# EAGLE board PCB v153 (EAGLE 9.7.0)
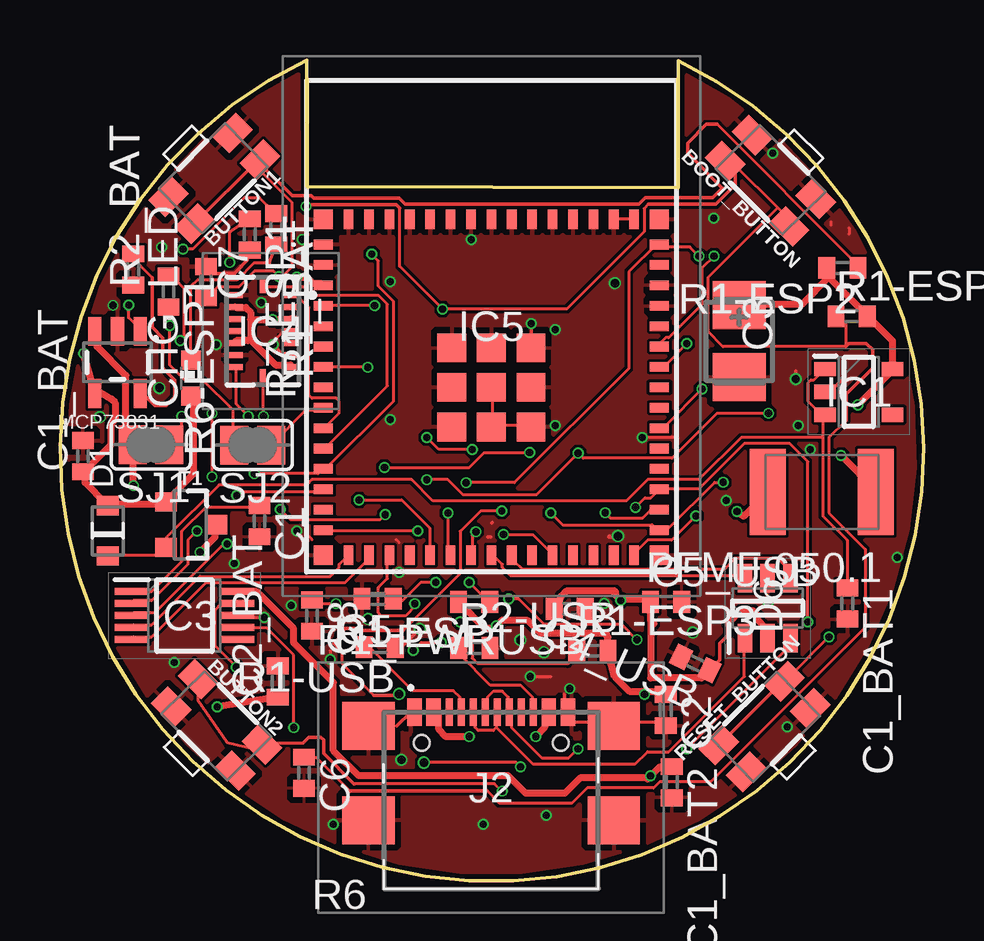
[diagram p0: board, top side]
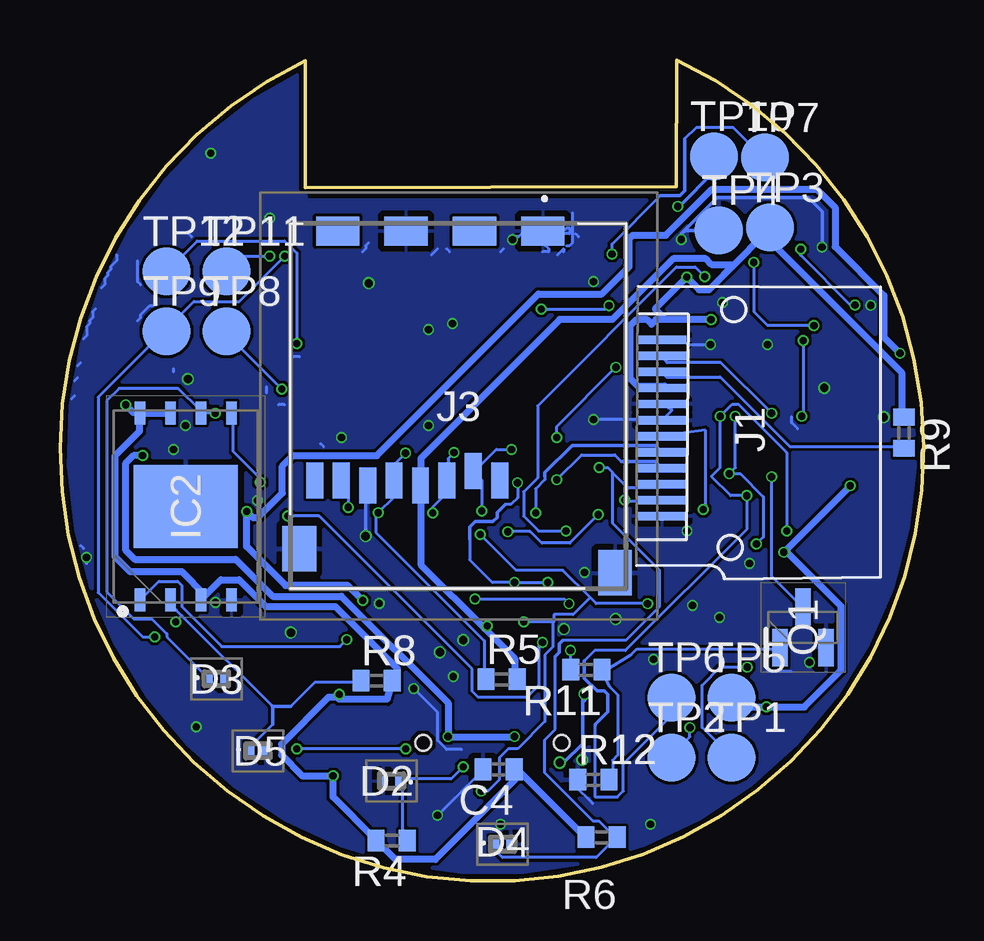
[diagram p1: board, bottom side, seen from below]

Size 35.99 x 34.23 mm. Coordinates in mm from the lower left corner, seen from the top.
Outline: 25.76,28.91 10.31,28.95 10.28,34.23 arc309 25.76,34.2 25.76,28.91
Copper layers (1*16): Top / Bottom
Stack-up Default Layer Stack: Top User Defined 0.035mm / Dielectric-1 User Defined 1.6mm / Bottom User Defined 0.035mm
Design rules: minimum copper width 0.125mm, minimum drill size 0.3mm, copper clearance wire_polygon to wire_polygon 5mil, copper clearance wire_polygon to pad_smd 5mil, copper clearance wire_polygon to via 5mil, copper clearance pad_smd to pad_smd 5mil, copper clearance pad_smd to via 5mil, copper clearance via to via 5mil, copper clearance smd to pad (same net) 5mil, copper clearance smd to via (same net) 5mil, copper clearance smd to smd (same net) 5mil, dimension clearance 0.2mm, via restrict clearance 0mil, restrict clearance 0mil, drill distance 6mil, keepout clearance 0mil

## Footprints (pad centres in the part's own frame; a part is rotated, then mirrored left to right if it is on the bottom)
SPARKFUN-SWITCHES_TACTILE_SWITCH_SMD_4.6X2.8MM = smd 1.4 x 1: 1 -1.919,-0.648; 2 1.847,-0.648; 3 1.872,0.902; 4 -1.944,0.952
EAGLE-LTSPICE_C0402 = smd 0.7 x 0.9: 1 -0.65,0; 2 0.65,0
CT3528 = smd 2 x 2.2: + -1.5,0; - 1.5,0
ADAFRUIT_CHIP-LED0603 = smd 0.8 x 0.8: A 0,-0.75; C 0,0.75
AVX---SD0805S020S1R0_AVX_SD0805S020S1R0_0 = smd 0.8 x 0.9: 1 -1.05,0; 2 1.05,0
PESD5V0S1BL315 = smd 0.4 x 0.7: 1 -0.35,0; 2 0.35,0
SOT95P280X145-6N = smd 1.2 x 0.6: 1 -1.25,0.95; 2 -1.25,0; 3 -1.25,-0.95; 4 1.25,-0.95; 5 1.25,0; 6 1.25,0.95
SOT95P280X120-5N = smd 0.9 x 0.6: 1 -1.4,0.95; 2 -1.4,0; 3 -1.4,-0.95; 4 1.4,-0.95; 5 1.4,0.95
SON127P800X600X80-9N = smd 0.95 x 0.45: 1 -3.9,1.905; 2 -3.9,0.635; 3 -3.9,-0.635; 4 -3.9,-1.905; 5 3.9,-1.905; 6 3.9,-0.635; 7 3.9,0.635; 8 3.9,1.905 | smd 3.45 x 4.35: 9 0,0
SOP50P490X110-10N = smd 1.4 x 0.3: 1 -2.2,1; 2 -2.2,0.5; 3 -2.2,0; 4 -2.2,-0.5; 5 -2.2,-1; 6 2.2,-1; 7 2.2,-0.5; 8 2.2,0; 9 2.2,0.5; 10 2.2,1
BMI085 = smd 0.675 x 0.25: 1 1.165,1.5; 2 1.165,1; 3 1.165,0.5; 4 1.165,0; 5 1.165,-0.5; 6 1.165,-1; 7 1.165,-1.5; 9 -1.165,-1.5; 10 -1.165,-1; 11 -1.165,-0.5; 12 -1.165,0; 13 -1.165,0.5; 14 -1.165,1; 15 -1.165,1.5 | smd 0.25 x 0.675: 8 0,-1.915; 16 0,1.915
MY-ESP = smd 0.8 x 0.4: 1 -7,5.95; 2 -7,5.1; 3 -7,4.25; 4 -7,3.4; 5 -7,2.55; 6 -7,1.7; 7 -7,0.85; 8 -7,0; 9 -7,-0.85; 10 -7,-1.7; 11 -7,-2.55; 12 -7,-3.4; 13 -7,-4.25; 14 -7,-5.1; 15 -7,-5.95; 31 7,-5.95; 32 7,-5.1; 33 7,-4.25; 34 7,-3.4; 35 7,-2.55; 36 7,-1.7; 37 7,-0.85; 38 7,0; 39 7,0.85; 40 7,1.7; 41 7,2.55; 42 7,3.4; 43 7,4.25; 44 7,5.1; 45 7,5.95 | smd 0.4 x 0.8: 16 -5.95,-7; 17 -5.1,-7; 18 -4.25,-7; 19 -3.4,-7; 20 -2.55,-7; 21 -1.7,-7; 22 -0.85,-7; 23 0,-7; 24 0.85,-7; 25 1.7,-7; 26 2.55,-7; 27 3.4,-7; 28 4.25,-7; 29 5.1,-7; 30 5.95,-7; 46 5.95,7; 47 5.1,7; 48 4.25,7; 49 3.4,7; 50 2.55,7; 51 1.7,7; 52 0.85,7; 53 0,7; 54 -0.85,7; 55 -1.7,7; 56 -2.55,7; 57 -3.4,7; 58 -4.25,7; 59 -5.1,7; 60 -5.95,7 | smd 1.2 x 1.2: 61 0,0; 66 -1.65,1.65; 67 -1.65,0; 68 -1.65,-1.65; 69 0,-1.65; 70 1.65,-1.65; 71 1.65,0; 72 1.65,1.65; 73 0,1.65 | smd 0.8 x 0.8: 62 -7,7; 63 -7,-7; 64 7,-7; 65 7,7
PCA6LA12HL3TR = smd 0.35 x 2: 1 -3.741,-4.26; 2 -3.072,-4.26; 3 -2.403,-4.26; 4 -1.735,-4.26; 5 -1.066,-4.26; 6 -0.398,-4.26; 7 0.271,-4.26; 8 0.939,-4.26; 9 1.608,-4.26; 10 2.276,-4.26; 11 2.945,-4.26; 12 3.614,-4.26
MY-USB = smd 0.3 x 1.15: A1 -3.35,3.678; A4 -2.55,3.678; A5 -1.25,3.678; A6 -0.25,3.678; A7 0.25,3.678; A8 1.25,3.678; A9 2.55,3.678; A12 3.35,3.678; B1 3.05,3.678; B4 2.25,3.678; B5 1.75,3.678; B6 0.75,3.678; B7 -0.75,3.678; B8 -1.75,3.678; B9 -2.25,3.678; B12 -3.05,3.678 | smd 2.18 x 2: MP1 -5.11,-0.827; MP2 5.11,-0.827; MP3 -5.11,3.103; MP4 5.11,3.103 | hole 0.65: -2.89,2.403; 2.89,2.403
112ATAARR03ATTEND = smd 1.8 x 1.2: G1 10.6,10.4; G2 4.9,10.4; S1 7.75,10.4; S2 2.05,10.4 | smd 1.4 x 1.9: G3 13.6,-3.85; G4 0.45,-2.85 | smd 0.7 x 1.5: P1 8.8,0; P2 7.7,0.4; P3 6.6,0; P4 5.5,-0.2; P5 4.4,0; P6 3.3,-0.2; P7 2.2,0; P8 1.1,0
SPARKFUN-IC-POWER_SOT23-5 = smd 0.55 x 1.2: 1 -0.95,-1.3; 2 0,-1.3; 3 0.95,-1.3; 4 0.95,1.3; 5 -0.95,1.3
VARISTOR_CT/CN1812 = smd 1.5 x 3.6: 1 -2.25,0; 2 2.25,0
SOT96P240X120-3N = smd 1.55 x 0.65: 1 -0.85,0.96; 2 -0.85,-0.96; 3 0.85,0
EAGLE-LTSPICE_R0402 = smd 0.7 x 0.9: 1 -0.65,0; 2 0.65,0
SJ = smd 1.168 x 1.6: 1 -0.762,0; 2 0.762,0
SPARKFUN-DISCRETESEMI_SOT23-3 = smd 0.8 x 0.9: 1 -0.95,-1; 2 0.95,-1; 3 0,1.1
TP20R = smd 2 x 2: TP 0,0

## Placement (x,y rotation side)
BOOT_BUTTON  [SPARKFUN-SWITCHES_TACTILE_SWITCH_SMD_4.6X2.8MM]  29.68,29.33 135 top
BUTTON1  [SPARKFUN-SWITCHES_TACTILE_SWITCH_SMD_4.6X2.8MM]  6.29,29.37 225 top
BUTTON2  [SPARKFUN-SWITCHES_TACTILE_SWITCH_SMD_4.6X2.8MM]  6.45,6.37 315 top
C1  1uF  [EAGLE-LTSPICE_C0402]  8.31,15 270 top
C1_BAT  4.7uF  [EAGLE-LTSPICE_C0402]  0.96,17.71 90 top
C1_BAT1  4.7uF 0603  [EAGLE-LTSPICE_C0402]  32.81,11.57 270 top
C1_BAT2  4.7uF 0603  [EAGLE-LTSPICE_C0402]  25.49,4.12 270 top
C2  1uF  [EAGLE-LTSPICE_C0402]  25.24,7.13 270 top
C2_BAT  4.7uF  [EAGLE-LTSPICE_C0402]  9.07,8.32 90 top
C3  100uF TANT C  [CT3528]  28.31,22.5 270 top
C4  100nF  [EAGLE-LTSPICE_C0402]  17.71,4.66 180 bottom
C4_USB  100nF  [EAGLE-LTSPICE_C0402]  26.47,9.07 155 top
C5  1uF  [EAGLE-LTSPICE_C0402]  13.23,11.77 180 top
C5_USB  4.7 uF 0603  [EAGLE-LTSPICE_C0402]  25.25,11.64 0 top
C6  100nF  [EAGLE-LTSPICE_C0402]  10.17,4.52 270 top
C7  100nF  [EAGLE-LTSPICE_C0402]  6.08,24.96 90 top
C8  100nF  [EAGLE-LTSPICE_C0402]  10.5,11.07 270 top
CHG_LED  [ADAFRUIT_CHIP-LED0603]  5.45,20.97 0 top
D1  AVX---SD0805S020S1R0_AVX_SD0805S020S1R0AVX_SD0805S020S1R0_0_0  [AVX---SD0805S020S1R0_AVX_SD0805S020S1R0_0]  1.99,14.6 90 top
D2  PESD3V3S1BLYL  [PESD5V0S1BL315]  22.17,4.17 180 bottom
D3  PESD3V3S1BLYL  [PESD5V0S1BL315]  29.47,8.43 0 bottom
D4  PESD3V3S1BLYL  [PESD5V0S1BL315]  17.54,1.54 0 bottom
D5  PESD3V3S1BLYL  [PESD5V0S1BL315]  27.74,5.43 0 bottom
D6  USBLC6-2SC6Y  [SOT95P280X145-6N]  29.48,11.38 90 top
IC1  XC6220A331MR-G  [SOT95P280X120-5N]  33.28,20.39 0 top
IC2  W25Q256JVEIQ  [SON127P800X600X80-9N]  30.75,15.61 90 bottom
IC3  DRV2605LDGST  [SOP50P490X110-10N]  5.19,11.07 0 top
IC4  BMI085  [BMI085]  8.45,22.93 0 top
IC5  ESP32-S3-MINI-1-N8  [MY-ESP]  17.97,20.58 0 top
J1  MY_LCD  [PCA6LA12HL3TR]  6.64,18.82 270 bottom
J2  USB4110-GF-A  [MY-USB]  17.96,3.36 0 top
J3  112A-TAAR-R03_ATTEND  [112ATAARR03ATTEND]  26.47,16.7 0 bottom
MCP73831  SPARKFUN-IC-POWER_MCP73831  [SPARKFUN-IC-POWER_SOT23-5]  2.4,21.62 180 top
PFMF.050.1  500mA  [VARISTOR_CT/CN1812]  31.75,16.22 180 top
Q1  2N7002  [SOT96P240X120-3N]  5.03,10.58 90 bottom
R1-ESP  10K  [EAGLE-LTSPICE_R0402]  17.25,11.64 180 top
R1-ESP1  10K  [EAGLE-LTSPICE_R0402]  32.98,23.55 0 top
R1-ESP2  10K  [EAGLE-LTSPICE_R0402]  32.6,25.56 180 top
R1-ESP3  10K  [EAGLE-LTSPICE_R0402]  22.18,9.6 0 top
R1-USB  5K1  [EAGLE-LTSPICE_R0402]  13.32,9.75 179.6 top
R1_BAT  200  [EAGLE-LTSPICE_R0402]  9.01,27.17 270 top
R1_PWRUSB  100K  [EAGLE-LTSPICE_R0402]  21.24,11.34 180 top
R2-USB  5K1  [EAGLE-LTSPICE_R0402]  17.26,9.72 0 top
R2_BAT  2K  [EAGLE-LTSPICE_R0402]  3.05,25.49 90 top
R4  10K  [EAGLE-LTSPICE_R0402]  22.17,1.69 180 bottom
R5  10K  [EAGLE-LTSPICE_R0402]  17.58,8.41 0 bottom
R6  10K  [EAGLE-LTSPICE_R0402]  13.42,1.83 180 bottom
R6-ESP1  100K  [EAGLE-LTSPICE_R0402]  4.53,24.58 270 top
R7-ESP1  100K  [EAGLE-LTSPICE_R0402]  7.91,26.96 270 top
R8  10K  [EAGLE-LTSPICE_R0402]  22.8,8.35 0 bottom
R9  22  [EAGLE-LTSPICE_R0402]  0.82,18.69 270 bottom
R11  10K  [EAGLE-LTSPICE_R0402]  14.05,8.81 180 bottom
R12  10K  [EAGLE-LTSPICE_R0402]  13.76,4.22 0 bottom
RESET_BUTTON  [SPARKFUN-SWITCHES_TACTILE_SWITCH_SMD_4.6X2.8MM]  29.49,6.36 45 top
SJ1  [SJ]  3.79,18.19 180 top
SJ2  [SJ]  8.03,18.17 180 top
T1  20V/4.2A/52mΩ/1.4W  [SPARKFUN-DISCRETESEMI_SOT23-3]  5.42,14.85 270 top
TP1  TPTP20R  [TP20R]  8,5.15 0 bottom
TP2  TPTP20R  [TP20R]  10.5,5.15 0 bottom
TP3  TPTP20R  [TP20R]  6.4,27.24 0 bottom
TP4  TPTP20R  [TP20R]  8.54,27.12 0 bottom
TP5  TPTP20R  [TP20R]  8,7.65 0 bottom
TP6  TPTP20R  [TP20R]  10.5,7.65 0 bottom
TP7  TPTP20R  [TP20R]  6.6,30.16 0 bottom
TP8  TPTP20R  [TP20R]  29.05,22.91 0 bottom
TP9  TPTP20R  [TP20R]  31.55,22.91 0 bottom
TP10  TPTP20R  [TP20R]  8.74,30.2 0 bottom
TP11  TPTP20R  [TP20R]  29.05,25.41 0 bottom
TP12  TPTP20R  [TP20R]  31.55,25.41 0 bottom

## Library data of the parts
BOOT_BUTTON BUTTON1 BUTTON2 RESET_BUTTON = ButtonSideways; PROD_ID: SWCH-14139; SF_SKU: COM-08720
C1 C1_BAT C1_BAT1 C1_BAT2 C2 C2_BAT C4 C4_USB C5 C5_USB C6-C8 = Library; SPICEMODEL: NONE; SPICEPREFIX: C
C3 = Library; SPICEPREFIX: C
CHG_LED PFMF.050.1 SJ1 SJ2 TP1-TP12 = Library
D1 = Library; CENTROID_NOT_SPECIFIED: No; DATASHEET: http://datasheets.avx.com/schottky.pdf; DIGIKEY_DESCRIPTION: DIODE SCHOTTKY 20V 1A 0805; DIGIKEY_PART_NUMBER: 478-7800-1-ND; LEAD_FREE: yes; MF: AVX; MOUSER_PART_NUMBER: 581-SD0805S020S1R0; MPN: SD0805S020S1R0; PACKAGE: 0805 (2012 metric); PREFIX: D; ROHS: yes; TEMPERATURE_RANGE_HIGH: +125°C; TEMPERATURE_RANGE_LOW: -55°C
D2-D5 = Library; ARROW_PART_NUMBER: PESD3V3S1BLYL; ARROW_PRICE-STOCK: https://www.arrow.com/en/products/pesd3v3s1blyl/nexperia?region=nac; DESCRIPTION: PESD3V3S1BL - Low capacitance bidirectional ESD protection diode; HEIGHT: 0mm; MANUFACTURER_NAME: Nexperia; MANUFACTURER_PART_NUMBER: PESD3V3S1BLYL; MOUSER_PART_NUMBER: 771-PESD3V3S1BLYL; MOUSER_PRICE-STOCK: https://www.mouser.co.uk/ProductDetail/Nexperia/PESD3V3S1BLYL?qs=vLWxofP3U2zWoKHYJMVoKQ%3D%3D
D6 = Library; ARROW_PART_NUMBER: USBLC6-2SC6Y; ARROW_PRICE-STOCK: https://www.arrow.com/en/products/usblc6-2sc6y/stmicroelectronics?region=nac; DESCRIPTION: Low Cap. ESD Protection Auto SOT-23-6 STMicroelectronics USBLC6-2SC6Y, Dual Uni-Directional TVS Diode Array, 6-Pin SOT-23; HEIGHT: 1.45mm; MANUFACTURER_NAME: STMicroelectronics; MANUFACTURER_PART_NUMBER: USBLC6-2SC6Y; MOUSER_PART_NUMBER: 511-USBLC6-2SC6Y; MOUSER_PRICE-STOCK: https://www.mouser.co.uk/ProductDetail/STMicroelectronics/USBLC6-2SC6Y?qs=gNDSiZmRJS%2FOgDexvXkdow%3D%3D
IC1 = Library; DESCRIPTION: LDO Voltage Regulators; HEIGHT: 1.2mm; MANUFACTURER_NAME: Torex; MANUFACTURER_PART_NUMBER: XC6220A331MR-G; MOUSER_PART_NUMBER: 865-XC6220A331MR-G; MOUSER_PRICE-STOCK: https://www.mouser.co.uk/ProductDetail/Torex-Semiconductor/XC6220A331MR-G?qs=AsjdqWjXhJ8ZSWznL1J0gg%3D%3D
IC2 = Library; ARROW_PART_NUMBER: W25Q256JVEIQ; ARROW_PRICE-STOCK: https://www.arrow.com/en/products/w25q256jveiq/winbond-electronics?region=nac; DESCRIPTION: 256M-bit Serial Flash Memory with uniform 4KB sectors and Dual/Quad SPI; HEIGHT: 0.8mm; MANUFACTURER_NAME: Winbond; MANUFACTURER_PART_NUMBER: W25Q256JVEIQ; MOUSER_PART_NUMBER: 454-W25Q256JVEIQ; MOUSER_PRICE-STOCK: https://www.mouser.co.uk/ProductDetail/Winbond/W25Q256JVEIQ?qs=qSfuJ%252Bfl%2Fd4o%2FNFUf7yCgA%3D%3D
IC3 = Library; ARROW_PART_NUMBER: DRV2605LDGST; ARROW_PRICE-STOCK: https://www.arrow.com/en/products/drv2605ldgst/texas-instruments?region=nac; DESCRIPTION: ERM & LRA Device Haptic Driver 2-5V BGA9 Texas Instruments DRV2605LDGST Piezo Haptic Motor Driver IC, 5 V, 10-Pin VSSOP; HEIGHT: 1.1mm; MANUFACTURER_NAME: Texas Instruments; MANUFACTURER_PART_NUMBER: DRV2605LDGST; MOUSER_PART_NUMBER: 595-DRV2605LDGST; MOUSER_PRICE-STOCK: https://www.mouser.co.uk/ProductDetail/Texas-Instruments/DRV2605LDGST?qs=asCBFxFfL1TjvcNdZsR2BA%3D%3D
IC4 = Library; ARROW_PART_NUMBER: BMI085; ARROW_PRICE-STOCK: https://www.arrow.com/en/products/bmi085/bosch; DESCRIPTION: IMUs - Inertial Measurement Units High-performance IMU BMI085 for virtual and augmented reality applications; HEIGHT: 1mm; MANUFACTURER_NAME: BOSCH; MANUFACTURER_PART_NUMBER: BMI085; MOUSER_PART_NUMBER: 262-BMI085; MOUSER_PRICE-STOCK: https://www.mouser.co.uk/ProductDetail/Bosch-Sensortec/BMI085?qs=y6ZabgHbY%252ByGCM8LfWZyqA%3D%3D
IC5 = Library; DESCRIPTION: WiFi Development Tools - 802.11 [Engineering Samples] SMD Module, ESP32-S3FN8, 8 MB SPI Flash, PCB Antenna; HEIGHT: 2.55mm; MANUFACTURER_NAME: Espressif Systems; MANUFACTURER_PART_NUMBER: ESP32-S3-MINI-1-N8; MOUSER_PART_NUMBER: 356-ESP32-S3-MINI1N8; MOUSER_PRICE-STOCK: https://www.mouser.co.uk/ProductDetail/Espressif-Systems/ESP32-S3-MINI-1-N8?qs=XAiT9M5g4x82rl6F%2FIYUQg%3D%3D
J1 = LCD_CORRECT
J2 = Library; DESCRIPTION: CONN USB 2.0 TYPE-C R/A SMT; HEIGHT: 3.26mm; MANUFACTURER_NAME: GCT (GLOBAL CONNECTOR TECHNOLOGY); MANUFACTURER_PART_NUMBER: USB4110-GF-A; MOUSER_PART_NUMBER: 640-USB4110-GF-A; MOUSER_PRICE-STOCK: https://www.mouser.co.uk/ProductDetail/GCT/USB4110-GF-A?qs=KUoIvG%2F9IlYiZvIXQjyJeA%3D%3D
J3 = Library; DESCRIPTION: Micro SD Card Socket, Push-Push Type, Top Mount, SMT, H=1.83mm, 10u; HEIGHT: 1.9mm; MANUFACTURER_NAME: ATTEND; MANUFACTURER_PART_NUMBER: 112A-TAAR-R03 ATTEND
MCP73831 = Library; PROD_ID: IC-09995
Q1 = Library; ARROW_PART_NUMBER: 2N7002; ARROW_PRICE-STOCK: https://www.arrow.com/en/products/2n7002/on-semiconductor?region=europe; DESCRIPTION: N-channel MOSFET,2N7002 0.115A 60V; HEIGHT: 1.2mm; MANUFACTURER_NAME: onsemi; MANUFACTURER_PART_NUMBER: 2N7002; MOUSER_PART_NUMBER: 512-2N7002; MOUSER_PRICE-STOCK: https://www.mouser.co.uk/ProductDetail/onsemi-Fairchild/2N7002?qs=0dwsXDNhqlz66WJJhrTFjQ%3D%3D
R1-ESP R1-ESP1-R1-ESP3 R1-USB R1_BAT R1_PWRUSB R2-USB R2_BAT R4-R6 R6-ESP1 R7-ESP1 R8 R9 R11 R12 = Library; SPICEMODEL: NONE; SPICEPREFIX: R
T1 = Library; PROD_ID: TRAN-14388

## Nets
3V3: C1_BAT2.1 C2.1 C3.+ C4.1 IC1.5 IC2.3 IC2.7 IC2.8 IC3.10 IC4.3 IC4.7 IC4.11 IC4.14 IC5.3 J1.4 J3.P4 R1-ESP1.2 R1-ESP2.2 R1-ESP3.2 R1-ESP.2 R4.2 R5.2 R6.2 R8.2 R9.1 TP3.TP
ADC_BAT: IC5.9 SJ2.1
BOOT: BOOT_BUTTON.3 BOOT_BUTTON.4 C6.1 IC5.4 R1-ESP1.1 TP10.TP
BUTTON1: BUTTON1.3 BUTTON1.4 C7.1 IC5.15 R1-ESP2.1
BUTTON2: BUTTON2.3 BUTTON2.4 C8.1 IC5.26 R1-ESP3.1
D+: D6.4 IC5.24
D-: D6.6 IC5.23
DISP_RST: IC5.20 J1.11
DN: D6.1 J2.A7 J2.B7
DP: D6.3 J2.A6 J2.B6
EN_DRV: IC3.5 IC5.17
GND: BOOT_BUTTON.1 BOOT_BUTTON.2 BUTTON1.1 BUTTON1.2 BUTTON2.1 BUTTON2.2 C1.2 C1_BAT1.2 C1_BAT2.2 C1_BAT.2 C2.2 C2_BAT.2 C3.- C4.2 C4_USB.2 C5.2 C5_USB.2 C6.2 C7.2 C8.2 D2.2 D3.2 D4.2 D5.2 D6.5 IC1.2 IC2.4 IC2.9 IC3.8 IC4.4 IC4.6 IC4.10 IC4.15 IC5.1 IC5.2 IC5.42 IC5.43 IC5.46 IC5.47 IC5.48 IC5.49 IC5.50 IC5.51 IC5.52 IC5.53 IC5.54 IC5.55 IC5.56 IC5.57 IC5.58 IC5.59 IC5.60 IC5.61 IC5.62 IC5.63 IC5.64 IC5.65 IC5.66 IC5.67 IC5.68 IC5.69 IC5.70 IC5.71 IC5.72 IC5.73 J1.1 J1.5 J1.6 J1.12 J2.A1 J2.A12 J2.B1 J2.B12 J2.MP1 J2.MP2 J2.MP3 J2.MP4 J3.G1 J3.G2 J3.G3 J3.G4 J3.P6 MCP73831.2 Q1.2 R1-USB.1 R1_PWRUSB.1 R2-USB.2 R2_BAT.1 R7-ESP1.2 R12.1 RESET_BUTTON.1 RESET_BUTTON.2 TP4.TP
IMU_INT1: IC4.16 IC5.11
IMU_INT2: IC4.1 IC5.10
IN_DRV: IC3.4 IC5.16
LEDA: J1.3 R9.2
LEDK: J1.2 Q1.3
MISO: D5.1 IC2.2 IC5.33 J3.P7 R8.1
MOSI: D4.1 IC2.5 IC5.31 J1.10 J3.P3 R6.1
N$1: J2.A5 R1-USB.2
N$2: C1_BAT1.1 D1.1 IC1.1 IC1.3 T1.2
N$3: Q1.1 R11.1 R12.2
N$4: R6-ESP1.2 R7-ESP1.1 SJ2.2
N$5: J2.B5 R2-USB.1
N$6: R6-ESP1.1 SJ1.1
N$7: MCP73831.1 R1_BAT.1
N$8: C1.1 IC3.1
N$9: CHG_LED.C R1_BAT.2
N$10: MCP73831.5 R2_BAT.2
PIN_LED: IC5.30 R11.2
PPG_INT: IC5.36 TP8.TP
RESET: C5.1 IC5.45 R1-ESP.1 RESET_BUTTON.3 RESET_BUTTON.4 TP9.TP
RX: IC5.40 TP11.TP
SCK: D3.1 IC2.6 IC5.32 J1.9 J3.P5 R5.1
SCL: IC3.2 IC4.8 IC5.13 TP6.TP
SDA: IC3.3 IC4.9 IC5.12 TP7.TP
SS_FLASH: IC2.1 IC5.18
SS_SD: D2.1 IC5.7 J3.P2 R4.1
SS_TFT: IC5.21 J1.8
TFT_DC: IC5.22 J1.7
TX: IC5.39 TP12.TP
VBAT: C2_BAT.1 MCP73831.3 SJ1.2 T1.3 TP5.TP
VBUS: C1_BAT.1 C4_USB.1 C5_USB.1 CHG_LED.A D1.2 D6.2 MCP73831.4 PFMF.050.1.2 R1_PWRUSB.2 T1.1
VIBE_OUT+: IC3.9 TP1.TP
VIBE_OUT-: IC3.7 TP2.TP
VUSB: J2.A4 J2.A9 J2.B4 J2.B9 PFMF.050.1.1

## Tracks (layer width: path | path; a pad name or v marks a point on that pad's centre or on a via)
3V3  (via drill 0.3)
  Top 0.152: 24.41,4.32 24.48,4.26
  Top 0.3: 24.35,7.91 23.72,7.91 23.12,8.51 R1-ESP3.2 22.83,10.16 22.73,10.26 | 24.35,7.91 25.07,7.91 C2.1 | R1-ESP.2 16.67,11.56 17.71,10.53 18.18,10.53 v18.18,10.64 18.42,10.88 19.46,10.88 20,10.34 22.65,10.34 22.73,10.26 | 22.77,10.31 22.73,10.26 | 7.94,23.41 7.94,23.71 7.74,23.91 7.34,23.91 IC4.14 | 7.94,23.41 7.94,22.56 | IC4.11 7.34,22.53 7.82,22.53 7.9,22.6 7.94,22.56 | 7.94,22.56 8.98,21.52 9.61,21.52 IC4.7 | 7.94,23.41 v8.86,23.41 9.61,23.41 IC4.3 | v9.87,25.17 10.28,25.17 10.53,24.92 10.87,24.92 IC5.3 | C1_BAT2.1 25.49,4.76 24.98,4.76 v24.61,4.38 24.48,4.26 | IC3.10 8.2,12.07 9.74,10.53 9.74,9.93 11.4,8.27 11.4,5.43 12.43,4.4 18.66,4.4 19.39,3.67 21.05,3.67 21.7,4.32 24.41,4.32 | 32.04,25.17 32.04,25.55 R1-ESP2.2 32.04,25.17 | 32.04,25.17 33.55,23.66 R1-ESP1.2 33.68,23.53 34.69,22.53 IC1.5 34.66,21.27 | 32.04,25.17 30.91,24.04 28.39,24.04 C3.+ | 34.66,21.27 | v33.25,19.85 34.66,21.27 | v24.35,7.78 24.35,7.91
  Bottom 0.152: 8.21,25.38 8.3,25.3 8.31,25.3 | 8.94,24.66 8.94,24.65 | 11.18,23.84 11.18,23.86
  Bottom 0.3: 18.3,10.52 20.95,13.18 20.95,16.31 J3.P4 20.95,16.5 20.95,17.62 15.16,23.41 12.97,23.41 10.44,25.94 9.08,25.94 8.84,25.71 7.89,25.71 | 18.3,10.52 17.05,9.27 17.05,8.41 R5.2 | 18.3,10.52 v18.18,10.64 | 8.94,24.65 9.35,24.65 v9.87,25.17 11.18,23.86 | 6.65,26.94 7.89,25.71 | 7.89,25.71 8.21,25.38 8.94,24.66 | TP3.TP 6.89,27.18 6.65,26.94 | 6.65,26.94 0.92,21.2 0.92,19.43 R9.1 | J1.4 10.8,20.64 11.91,20.64 12.24,20.97 12.24,23.13 11.97,23.4 11.52,23.4 11.34,23.21 11.14,23.41 10.75,23.41 | v8.86,23.41 10.75,23.41 | 16.92,4.63 17.05,4.76 C4.1 16.92,4.63 | 16.92,4.63 16.77,4.48 | 16.77,4.48 14.15,1.86 R6.2 | 16.77,4.48 20.35,0.9 22.01,0.9 22.72,1.61 R4.2 22.84,1.74 24.61,3.5 v24.61,4.38 25.88,4.38 26.76,5.25 26.76,5.71 24.8,7.66 24.35,7.66 | IC2.7 31.41,19.5 32.54,19.5 IC2.8 | 29.93,11.91 30.02,11.82 IC2.3 | 29.93,11.91 29.28,12.56 28.52,12.56 27.41,11.44 24.52,11.44 21.91,8.84 R8.2 22.37,7.57 24.35,7.57 24.35,7.66 | 29.93,11.91 30.9,12.89 33.07,12.89 33.69,13.51 33.69,17.73 32.67,18.75 32.67,19.5 IC2.8 | v33.25,19.85 32.91,19.51 IC2.8 | 24.35,7.66 v24.35,7.78 | 8.05,25.56 8.31,25.3 | 10.75,23.41 11.18,23.84
ADC_BAT
  Top 0.125: IC5.9 10.87,19.63 10.24,19.63 8.86,18.24 SJ2.1
BOOT  (via drill 0.3)
  Top 0.125: v13.11,23.98 IC5.4 | 27.71,29.97 BOOT_BUTTON.3 28.11,29.86 28.12,29.85 29.9,28.07 | 29.9,28.07 30.33,27.64 BOOT_BUTTON.4 | v10.25,28.12 10.32,28.19 | 14.15,28.06 14.15,25.63 v15.94,23.84 21.12,23.84 24.34,27.07 24.34,28.04 24.52,28.21 | 12.08,3.75 10.7,5.14 10.24,5.14 C6.1 | 17.8,3.76 18.31,3.25 21.33,3.25 21.96,3.88 24.73,3.88 24.98,4.13 27.11,4.13 33.55,10.57 33.55,13.83 32.04,15.34 32.04,18.49 32.75,19.21 | R1-ESP1.1 32.42,23.53 32.74,23.22 32.74,22.28 27.62,22.28 27,22.9 27,25.17 29.9,28.07
  Top 0.152: 17.8,3.76 12.09,3.76 12.08,3.75 | 32.75,19.21 32.75,20.28 33.86,21.39 33.86,22.15 33.6,22.4 32.86,22.4 32.74,22.28 | 24.52,28.21 27.33,28.21 28.14,29.03 28.14,29.83 28.12,29.85 | v10.25,28.12 10.32,28.19 14.02,28.19 14.15,28.06
  Bottom 0.125: v15.94,23.84 13.25,23.84 v13.11,23.98 | TP10.TP 8.73,29.58
  Bottom 0.152: v10.25,28.12 10.19,28.12 8.73,29.58
BUTTON1  (via drill 0.3)
  Top 0.125: v14.9,14.59 11,14.59 IC5.15 | C7.1 6.11,24.32 6.58,24.79 7.46,24.79 8.1,25.42 8.9,25.42 v9.13,25.2 9.26,25.2 9.66,25.6 9.66,28.29 8.31,29.65 BUTTON1.4 8.28,30.13 8.27,30.14 8.31,30.22 | 27.38,31.54 33.03,25.89 R1-ESP2.1 | BUTTON1.3
  Top 0.152: BUTTON1.4 8.35,30.15 | 27.38,31.54 26.94,31.54 26.16,30.76 26.16,30.33 27.6,28.89 27.2,28.49 24.39,28.49 24.12,28.22 14.39,28.22 14.14,28.47 10.57,28.47 10.47,28.57 9.67,28.57 8.41,29.83 8.45,30.15 8.35,30.15 | 8.3,30.15 8.35,30.15 | BUTTON1.3 8.28,30.08 8.28,30.13
  Bottom 0.125: v14.9,14.59 16.04,14.59 16.67,15.22 16.67,16.23 16.09,16.81 16.09,19.81 10.3,25.59 9.52,25.59 v9.13,25.2
BUTTON2  (via drill 0.3)
  Top 0.125: BUTTON2.4 5.75,7.54 6.97,5.77 8.2,5.47 BUTTON2.3 8.41,5.7 8.48,5.77 10.13,5.77 | v18.48,14.45 19.71,14.45 20.45,13.71 IC5.26 | v11.5,11.56 10.75,11.56 10.62,11.69 C8.1 | v16.67,10.81 17.17,10.3 17.17,9.3 17.39,9.07 21.18,9.07 R1-ESP3.1 | 12.27,4.06 18.1,4.06 18.4,3.75 v18.43,3.75
  Top 0.152: 10.13,5.77 10.36,6 10.87,6 10.99,5.88 10.99,5.32 12.25,4.06 12.27,4.06
  Bottom 0.125: v18.48,14.45 16.98,12.95 15.03,12.95 13.9,11.82 | 13.9,11.82 13.64,11.56 v11.5,11.56 | 15.46,10.81 15.41,10.81 15.41,11.11 14.6,11.11 13.9,11.82 | 15.46,10.81 v16.67,10.81 | v18.43,3.75 18.15,3.75 17.68,4.22 17.68,5.14 17.3,5.52 16.92,5.52 15.79,6.65 15.79,9.42 15.46,9.75 15.46,10.81
D+
  Top 0.125: IC5.24 18.94,13.58 18.94,13.33 19.27,12.99 27.67,12.99 28.13,13.45 29.9,13.45 30.4,12.95 30.4,12.7 D6.4
D-
  Top 0.125: IC5.23 18.05,13.58 18.43,13.2 18.43,13.08 18.78,12.73 28.5,12.73 D6.6
DISP_RST  (via drill 0.3)
  Top 0.125: v12.46,15.89 14.23,15.89 15.41,14.71 15.41,13.71 IC5.20
  Bottom 0.125: v12.46,15.89 12.46,15.85 10.92,15.85 J1.11
DN
  Top 0.125: 18.18,6.4 18.05,6.27 17.42,6.27 17.3,6.4 17.3,7.03 J2.B7 | 18.18,6.4 18.18,7.03 J2.A7 | 18.18,6.4 19.69,4.89 23.98,4.89 24.48,5.39 25.37,5.39 28.51,8.53 28.51,10.05 D6.1
DP  (via drill 0.3)
  Top 0.125: J2.A6 17.8,7.15 17.8,7.66 18.05,7.91 18.43,7.91 18.68,7.66 18.68,7.15 J2.B6 18.81,7.03 18.81,6.4 20.07,5.14 21.2,5.14 v21.58,5.52 | v26.12,5.52 30.4,9.8 30.4,10.05 D6.3
  Bottom 0.125: v21.58,5.52 v26.12,5.52
EN_DRV
  Top 0.125: IC5.17 12.76,13.58 12.76,13.33 11.88,12.45 6.08,12.45 3.82,10.18 3.06,10.18 IC3.5
GND  (via drill 0.3, 0.35)
  Top 0.125: 9,22.23 9,22.36 v8.88,22.36 | 9.25,22.86 9,22.61 | 9.5,21.98 IC4.6 | 7.25,21.98 6.88,21.98 | 18,18.98 18,20.48 IC5.61 | 19.63,18.98 IC5.70 19.5,18.98 18,18.98 | 18,18.98 IC5.69 | IC5.46 23.88,27.61 23.13,27.61 IC5.47 | 17.13,27.48 IC5.54 | v19.63,23.23 IC5.72 | 32.13,27.36 32.13,27.48 | 32.88,27.23 32.88,26.98 | 25.75,18.48 v24.25,18.48 | 28.25,20.98 C3.- | 21,7.78 21,7.61 | 21,7.11 J2.B1 21,6.98 | 21.38,6.61 25.1,6.61 C2.2 | 11.25,9.61 v11.25,9.23 | v30.75,18.98 30.63,19.11 | 25,13.61 IC5.64 | v19.59,8.52 20.45,8.52 | v8.5,10.98 7.5,10.98 IC3.8 | 8.25,14.23 C1.2 | 10.5,14.23 10.38,14.36 | 14.13,14.11 14,14.23 | 11,26.61 IC5.1 | J2.B12 14.88,7.11 14.63,7.11 J2.A1
  Top 0.152: 14.91,10.43 v14.99,10.51 14.24,9.75 R1-USB.1 | 14.04,6.46 J2.A1 | v30.65,20.93 30.65,21.27 | 32.57,20.88 32.08,20.39 IC1.2 | C7.2 6.37,25.33 7.26,25.33 7.81,25.89 7.81,26.21 R7-ESP1.2 | 17.83,14.35 17.95,14.35 | 17.99,14.92 18.02,14.95 | 22.97,14.34 22.86,14.34 22.89,14.38 | IC4.6 9.31,21.93 v8.88,22.36 | 31.08,7.21 RESET_BUTTON.2
  Bottom 0.125: 9.75,22.36 v8.88,22.36 | 5.5,19.36 5.5,19.11 5.25,18.86 | 14.63,27.86 14.63,26.61 14.75,26.48 14.88,26.48 | 15.25,26.11 15,26.36 15,26.23 | 26,21.86 26.25,21.86 | 32.75,25.86 32.75,24.98 32.63,24.86 | 32,24.11 32.13,23.98 32.25,23.98 32.63,23.61 32.63,23.48 32.75,23.36 | 35,13.36 34.88,13.23 | 35.13,13.98 35,13.86 | 35.38,20.23 35.5,20.11 | 35.25,20.98 35.38,20.86 | 35.13,21.61 35.25,21.48 | 35,22.61 34.88,22.73 34.88,23.11 34.75,23.23 34.75,23.36 34.63,23.48 34.63,23.73 34.5,23.86 | 34.25,24.73 34.13,24.86 34.13,25.11 34,25.23 34,25.36 33.88,25.48 33.88,25.61 33.63,25.86 33.63,26.11 | 14.5,26.98 14.38,26.86 | 17,26.86 16.88,26.86 16.63,27.11 | 15.75,27.36 16,27.11 | 15.5,26.98 14.75,26.98 14.75,27.23 14.88,27.23 15,27.11 15.5,27.11 | 15.88,26.23 15.63,26.23 15.63,26.36 15.75,26.48 15.75,26.73 16,26.98 | 20.5,26.11 20.25,26.36 | 21.5,26.73 21.75,26.98 | 21.38,27.23 21.38,27.11 21.25,26.98 | 25,18.11 25.13,18.23 | 30.63,26.98 30.5,26.86 | 19.75,26.23 19.88,26.36 | 17.5,26.36 17.63,26.23 | 31.25,21.23 31.25,21.36 | 27.38,20.36 27.38,20.61 | 26.63,19.86 26.88,19.86 | 23.38,26.23 23.25,26.36 23.25,26.48 23.13,26.61 | 18.38,4.61 v20.25,2.73 | 13.79,3.23 14.58,4.02 R12.1 | 19.25,5.48 19.88,5.48 20.25,5.86 20.25,7.03 v21.24,8.02 | 6.5,8.73 5.5,8.73 | 19.7,8.52 v19.59,8.52 | 12.87,12.86 J3.G3 | v13.75,19.23 10.88,19.23 10.48,19.63 J1.5
  Bottom 0.152: J3.P6 23.25,16.41 v23.25,14.38 | TP4.TP 9.94,27.12 10.1,26.96 v10.1,26.75 10.1,26.98 8.6,28.48 4.81,28.48 4.23,27.91 v4.23,26.42
  other vias: 29.5,11.61 6.5,22.36 8.38,24.11 2.21,24 20.63,18.98 17.13,26.73 29.7,30.35 27.24,27.63 34.88,13.48 30.31,6.43 17.63,2.36 11.38,2.36 4.75,9.11 27.75,15.86 31.25,17.98 9.63,11.48 7.25,13.23 9.86,14.6 14.13,12.86 20.63,22.98 13.75,24.98 4.14,20.56 1.66,19.34 23.12,24.92 12.84,10.92 19.18,10.04 22.68,11.57 20.16,9.53 14.22,5.05 26.37,10.36
  pour Bottom: -17.09,-18 51.85,-18 51.85,51.43 25.67,51.43 25.67,28.45 10.29,28.45 10.29,51.62 -16.56,51.62 -16.56,48.72
  pour Top: 48.45,-15.58 48.45,49.33 25.68,49.33 25.68,28.47 10.27,28.47 10.27,49.29 -13.32,49.29 -13.32,-15.64 -7.36,-15.64
IMU_INT1
  Top 0.125: IC4.16 8.5,24.75 10.16,24.75 10.49,24.42 13.28,24.42 13.64,24.05 13.64,20.64 11,17.99 IC5.11
IMU_INT2
  Top 0.125: IC4.1 9.74,24.42 9.86,24.42 10.37,23.91 10.37,20.26 10.49,20.13 11.5,20.13 11.63,20.01 11.63,19.5 11,18.87 IC5.10
IN_DRV
  Top 0.125: IC5.16 12.01,13.58 11.63,13.2 11.63,13.08 11.25,12.7 5.83,12.7 3.82,10.68 3.06,10.68 IC3.4
LEDA
  Bottom 0.125: R9.2 0.85,18.12 5.58,18.12 8.48,21.01 10.72,21.01 J1.3
LEDK  (via drill 0.3)
  Top 0.125: v6.34,16.86 v6.34,19.5
  Bottom 0.125: v6.34,19.5 8.44,21.61 10.7,21.61 J1.2 | v6.34,16.86 6.34,12.7 5.08,11.44 Q1.3
MISO  (via drill 0.3)
  Top 0.125: v23.98,15.58 24.37,15.97 24.61,15.97 24.86,16.23 IC5.33 24.98,16.35 26.62,16.35 28.51,18.24 30.4,18.24 31.16,17.49 v31.16,10.81
  Bottom 0.125: v23.98,15.58 23.98,16.35 24.22,16.59 J3.P7 | 26.37,7.28 25.36,8.29 23.53,8.29 R8.1 | 27.12,6.53 28.01,5.64 28.01,5.52 D5.1 | 27.15,7.3 30.91,11.06 | 30.91,11.06 31.28,11.44 31.28,11.69 IC2.2 | 30.91,11.06 v31.16,10.81
  Bottom 0.152: 26.37,7.28 27.13,7.28 | 27.13,7.28 27.12,7.27 27.12,6.53 | 27.13,7.28 27.15,7.3
MOSI  (via drill 0.3)
  Top 0.125: v20.45,15.34 20.94,14.85 24.67,14.85 IC5.31 24.98,14.71 25.36,14.71 27.27,16.62 v27.64,16.62 | v19.57,17.86 17.68,17.86 17.05,17.23 v13.52,17.23
  Bottom 0.125: v20.45,15.34 20.45,15.6 19.94,16.1 19.94,16.63 J3.P3 19.82,16.76 19.82,17.61 v19.57,17.86 | v27.64,16.62 27.64,16.77 28.76,17.9 28.76,19.5 IC2.5 | D4.1 17.8,1.48 17.8,1.23 17.55,0.98 13.64,0.98 12.89,1.74 R6.1 12.89,1.86 13.52,2.49 13.77,2.49 15.79,4.51 15.79,5.89 15.36,6.32 15.36,9.36 | J1.10 11.04,16.4 12.35,16.4 12.96,17 | 12.96,17 12.96,17.03 13.16,17.23 v13.52,17.23 | 12.96,17 12.96,16.38 12.96,14.91 11,12.95 11,11.44 12.4,10.03 15.04,10.03
  Bottom 0.152: 15.04,10.03 15.19,9.88 15.19,9.53 15.36,9.36
N$1
  Top 0.125: R1-USB.2 12.88,9.76 14.7,7.93 16.39,7.93 16.67,7.66 16.67,7.15 J2.A5
N$2
  Top 0.125: D1.1 2.05,13.58 4.07,13.58 4.32,13.83 T1.2 4.45,13.96 4.45,14.34 6.63,16.52 10.28,16.52 10.49,16.73 14.65,16.73 15.53,15.85 23.6,15.85 24.48,16.73 26.62,16.73 28.39,18.49 31.79,18.49 | 31.79,18.49 31.79,19.38 31.78,19.38 | 31.79,18.49 31.79,15.22 32.8,14.21 32.8,12.32 C1_BAT1.1 | 31.78,19.38 31.17,20 31.17,20.77 31.28,20.89 31.41,20.89 31.83,21.31 IC1.1 | 31.78,19.38 IC1.3
N$3
  Bottom 0.125: R12.2 13.11,4.48 12.96,4.63 12.96,5.03 12.74,5.26 12.74,7.76 13.08,8.1 R11.1 13.22,8.81 12.2,9.42 11.95,9.67 6.08,9.67 Q1.1
N$4  (via drill 0.3)
  Top 0.125: R6-ESP1.2 4.57,23.85 v4.57,23.16 4.57,21.52 5.2,20.89 5.96,20.89 7.22,19.63 7.22,18.24 SJ2.2 | v7.07,25.79 7.07,27.04 R7-ESP1.1
  Bottom 0.125: v7.07,25.79 7.07,23.73 6.5,23.16 v4.57,23.16
N$5
  Top 0.125: R2-USB.1 16.67,9.65 16.67,9.42 17.93,8.16 19.19,8.16 19.69,7.66 19.69,7.15 J2.B5
N$6  (via drill 0.3)
  Top 0.125: v5.02,22.53 5.18,22.69 5.18,24.69 4.95,24.92 R6-ESP1.1 | v5.08,19.38 5.08,18.75 4.57,18.24 SJ1.1
  Bottom 0.125: v5.02,22.53 5.02,19.44 v5.08,19.38
N$7  (via drill 0.3)
  Top 0.125: v5.13,26.34 v5.13,26.35 5.54,26.35 7.68,28.5 8.3,28.5 8.86,27.94 8.97,27.94 R1_BAT.1 | v2.86,24.01 2.86,23.48 3.32,23.02 MCP73831.1
  Bottom 0.125: v5.13,26.34 5.13,26.08 3.05,24.01 v2.86,24.01
N$8
  Top 0.125: IC3.1 3.82,12.07 5.08,13.33 5.08,14.59 6.08,15.6 8.23,15.6 C1.1
N$9
  Top 0.125: CHG_LED.C 5.44,21.73 5.44,24.78 5.72,25.06 7.38,25.06 8.07,25.75 8.72,25.75 R1_BAT.2
N$10
  Top 0.125: 3.84,25.15 3.06,25.92 R2_BAT.2
  Top 0.152: 3.84,25.15 3.84,23.09 4.29,22.64 4.29,21.38 4.78,20.88 4.78,20.18 4.42,19.82 3.95,19.82 3.45,20.32 MCP73831.5 3.36,20.3
PIN_LED  (via drill 0.3)
  Top 0.125: v26.5,15.22 25.49,14.21 24.48,14.21 23.98,13.71 IC5.30 | v15.88,9.94 15.04,9.94 v14.71,9.62
  Bottom 0.125: v15.88,9.94 16.04,9.79 16.04,8.16 16.54,7.66 18.56,7.66 18.81,7.91 18.81,8.84 25.19,15.22 v26.5,15.22 | v14.71,9.62 R11.2
PPG_INT  (via drill 0.3)
  Top 0.125: v26.75,20.51 25.24,19 24.98,19 IC5.36
  Bottom 0.125: v26.75,20.51 29.14,22.9 TP8.TP
RESET  (via drill 0.3)
  Top 0.125: 27.55,5.68 RESET_BUTTON.4 | RESET_BUTTON.3 v32.04,10.18 | v15.66,12.45 15.03,12.45 14.27,11.69 14.05,11.69 C5.1 | v17.05,12.45 17.8,11.69 R1-ESP.1 | v26.62,26.05 26.24,26.43 24.98,26.43 IC5.45 24.86,26.56 23.7,25.4 23.7,21.37 18.94,16.6 v16.92,16.6
  Top 0.152: RESET_BUTTON.4 30.1,8.32 RESET_BUTTON.3
  Bottom 0.125: v15.66,12.45 v17.05,12.45 17.97,12.45 18.92,13.39 18.92,14.24 | v26.62,26.05 28.51,24.16 30.4,24.16 31.54,23.03 TP9.TP 31.66,22.9 34.4,20.17 34.4,12.03 32.54,10.18 v32.04,10.18 | 17.43,15.7 17.2,15.7 16.92,15.97 v16.92,16.6
  Bottom 0.152: 17.43,15.7 17.77,15.36 17.77,15.16 17.95,14.98 18.69,14.98 18.92,14.75 18.92,14.24
RX  (via drill 0.3)
  Top 0.125: v27.25,26.05 26.75,25.55 26.75,24.04 25.36,22.65 25.24,22.65 24.98,22.4 IC5.40
  Bottom 0.125: v27.25,26.05 28.39,26.05 29.02,25.42 TP11.TP
SCK  (via drill 0.3)
  Top 0.125: v22.72,15.35 22.93,15.14 24.28,15.14 24.61,15.47 24.86,15.47 IC5.32 | v15.28,16.73 16.16,16.73 16.79,16.1 19.85,16.1 v21.59,17.84 21.79,17.63 25.51,17.63 27.38,19.5 v29.52,19.5
  Bottom 0.125: D3.1 29.9,8.54 31.54,10.18 31.54,10.3 32.17,10.93 32.92,10.93 34.03,12.04 34.03,20.03 33.52,20.54 31.06,20.54 30.15,19.63 IC2.6 30.02,19.5 v29.52,19.5 | R5.1 18.31,8.41 18.31,10.02 22.83,14.54 22.83,15.25 v22.72,15.35 22.09,15.99 22.09,16.64 J3.P5 22.27,17.16 v21.59,17.84 | 12.6,17.5 12.86,17.76 14.25,17.76 v15.28,16.73
  Bottom 0.152: J1.9 11.19,17.5 12.6,17.5
SCL  (via drill 0.3)
  Top 0.125: v8.48,19.38 8.48,20.89 IC4.8 | v7.37,16.07 7.53,16.23 10.87,16.23 IC5.13 | v5.71,14.59 5.33,14.21 5.33,13.2 3.82,11.69 3.06,11.69 IC3.2
  Bottom 0.125: v5.71,14.59 5.71,17.86 7.72,19.88 7.97,19.88 v8.48,19.38 8.48,17.23 8.85,16.86 8.05,16.07 v7.37,16.07 7.37,14.66 12.43,9.6 13.71,9.6 14.13,9.19 | 13.68,6.48 13.68,3.5 12.76,3.5 12.51,3.75 12.51,4.89 10.62,6.78 10.62,7.53 TP6.TP
  Bottom 0.152: 13.68,6.48 13.68,6.52 13.16,7.05 13.16,7.78 13.3,7.92 13.61,7.92 14.13,8.45 14.13,9.19
SDA  (via drill 0.3)
  Top 0.125: v7.85,19.38 7.34,19.88 7.34,21.39 IC4.9 | v8.1,16.98 10.75,16.98 10.87,17.11 IC5.12 11,17.11 13.9,20.01 13.9,24.16 13.27,24.79 13.27,25.85 v12.98,26.13 | v6.97,14.05 6.82,14.05 3.96,11.19 3.06,11.19 IC3.3
  Bottom 0.125: v7.85,19.38 7.85,17.23 v8.1,16.98 7.65,16.98 6.68,16.01 6.68,14.34 v6.97,14.05 | v12.98,26.13 12.98,26.56 10.97,28.57 | 9.95,30.94 9.46,31.43 7.95,31.43 6.73,30.21 6.61,30.21 TP7.TP
  Bottom 0.152: 9.95,30.94 9.95,28.78 10.16,28.57 10.97,28.57
SS_FLASH  (via drill 0.3)
  Top 0.125: v14.78,11.56 14.78,11.44 14.4,11.06 13.39,11.06 13.27,11.19 13.27,12.23 13.64,12.61 13.64,13.58 IC5.18 | v18.69,11.75 19.11,11.75 20.17,10.69 23.41,10.69 v24.04,10.06
  Bottom 0.125: v18.69,11.75 14.97,11.75 v14.78,11.56 | v24.04,10.06 24.32,9.78 29.25,9.78 30.91,11.44 30.91,12.32 31.09,12.5 31.86,12.5 32.54,11.82 IC2.1
SS_SD  (via drill 0.3, 0.35)
  Top 0.125: v12.82,21.42 10.98,21.42 IC5.7 | v15.28,18.49 15.79,17.99 v17.17,17.99 | v19.19,4.76 19.01,4.94 v15.16,4.94 | 13.08,7.74 11.74,9.07 11.74,9.56 | 14.3,10.45 16.67,12.82 16.67,14.57 17.52,15.43 v18.41,15.43
  Top 0.152: 11.74,9.56 11.4,9.9 11.61,10.11 11.61,10.25 11.89,10.53 12.44,10.53 12.52,10.45 14.3,10.45 | v15.16,4.94 15.07,4.94 | 13.08,7.74 14.07,7.74 v14.13,7.79
  Bottom 0.125: R4.1 21.58,1.74 21.71,1.86 21.71,4.13 D2.1 21.71,4.26 19.69,4.26 v19.19,4.76 | v15.28,18.49 15.28,18.96 v12.82,21.42 | v17.17,17.99 17.8,17.99 18.64,17.15 J3.P2 18.6,16.89 18.41,16.71 v18.41,15.43
  Bottom 0.152: v15.16,4.94 14.99,4.94 14.2,5.72 14.2,7.46 | 14.2,7.46 14.19,7.58 | 14.2,7.46 14.13,7.52 v14.13,7.79
SS_TFT  (via drill 0.3)
  Top 0.125: v16.16,15.34 16.16,13.71 IC5.21
  Bottom 0.125: v16.16,15.34 16.16,16.35 15.79,16.73 15.79,16.86
  Bottom 0.152: J1.8 11.18,18.16 14.65,18.16 15.79,17.02 15.79,16.86
TFT_DC  (via drill 0.3)
  Top 0.125: v17.33,14.56 17.17,14.41 17.17,13.71 IC5.22 | v13.55,15.27 13.33,15.05 9.62,15.05 v9.18,15.49
  Bottom 0.125: v17.33,14.56 16.39,14.56 15.91,14.08 14.74,14.08 v13.55,15.27 | v9.18,15.49 9.11,15.57 9.11,18.8 J1.7
TX  (via drill 0.3)
  Top 0.125: v26.12,22.4 25.24,21.52 24.98,21.52 IC5.39
  Bottom 0.125: v26.12,22.4 26.12,26.18 26.62,26.68 30.28,26.68 31.54,25.42 TP12.TP
VBAT  (via drill 0.3)
  Top 0.3: MCP73831.3 1.55,22.9 1.55,22.27 2.74,21.08 2.74,18.44 2.93,18.24 SJ1.2 3.06,18.12 v3.06,16.48 | v5.83,13.71 6.46,14.34 6.46,14.84 T1.3 | v6.55,7.26 8.97,7.66 C2_BAT.1
  Bottom 0.3: TP5.TP 7.61,7.26 v6.55,7.26 4.97,7.26 3.44,8.79 3.44,11.45 5.69,13.71 v5.83,13.71 v3.06,16.48
VBUS  (via drill 0.3)
  Top 0.152: 2.12,18.23 2.14,18.2 | 27.82,10.73 27.82,10.25 27.49,9.91 27.49,9.22 C4_USB.1
  Top 0.3: CHG_LED.A 5.58,20.13 5.58,16.98 4.45,15.85 T1.1 4.32,15.72 2.05,15.72 D1.2 1.93,15.72 1.04,16.6 1.04,16.98 C1_BAT.1 1.04,17.11 2.14,18.2 | 24.61,10.86 24.61,11.56 C5_USB.1 24.48,11.69 24.44,11.73 23.4,11.73 v23.37,11.7 23.13,11.94 23.13,12.09 21.1,12.09 20.88,11.87 R1_PWRUSB.2 | 24.61,10.86 24.61,8.46 26.72,8.46 C4_USB.1 | D6.2 29.39,10.18 29.39,10.56 29.05,10.9 29.05,11.09 28.87,11.27 28.37,11.27 27.82,10.73 | PFMF.050.1.2 28.48,15.21 v28.21,15.41 | v0.99,22 0.99,21.87 MCP73831.4 1.76,20.32 2.14,20.1 2.3,19.94 2.3,19.24 2.12,19.06 2.12,18.23 | 24.61,10.86 24.74,10.73
  Bottom 0.3: v0.99,22 1.66,22.67 1.66,24.41 3.69,26.44 3.69,28.08 4.45,28.84 8.82,28.84 10.74,26.92 12.13,26.92 12.27,26.78 12.27,25.6 13.4,24.47 16.05,24.47 22.78,17.74 26.28,17.74 26.72,17.3 26.72,16.17 27.74,15.15 27.95,15.15 v28.21,15.41 28.21,13.94 26.58,12.32 23.99,12.32 v23.37,11.7
VIBE_OUT+  (via drill 0.3)
  Top 0.125: v7.34,8.92 6.46,9.8 6.46,11.31 6.71,11.56 7.34,11.56 IC3.9
  Bottom 0.125: v7.34,8.92 8.48,8.92 9.23,8.16 9.23,6.4 8.1,5.26 TP1.TP
VIBE_OUT-  (via drill 0.3)
  Top 0.125: v9.74,6.4 9.74,9.42 8.6,10.56 7.47,10.56 IC3.7
  Bottom 0.125: v9.74,6.4 9.74,6.02 10.49,5.26 TP2.TP
VUSB  (via drill 0.3)
  Top 0.3: J2.A4 15.53,7.03 15.66,7.03 J2.B9 15.79,7.03 15.79,6.31 16.08,6.02 v17.05,6.02 | J2.A9 20.45,7.03 20.32,7.03 J2.B4 20.2,7.03 20.2,6.4 v19.82,6.02 | v32.54,17.74 34.06,16.23 PFMF.050.1.1
  Bottom 0.3: v17.05,6.02 v19.82,6.02 19.82,7.43 24.26,11.87 27.12,11.87 28.67,13.41 32.87,13.41 33.26,13.81 33.26,17.4 32.92,17.74 v32.54,17.74